# Altium PCB alireza_aghasadeghi.PcbDoc
Units mm, origin at the board's own origin, x right, y up, seen from the top; angles counter-clockwise.
Board outline 101.05 x 73 mm, 2 copper layers (Top Layer, Bottom Layer); 28 components, 23 nets, 119 pads, 18 vias.
Unrouted connection lines stored in the file: 1.
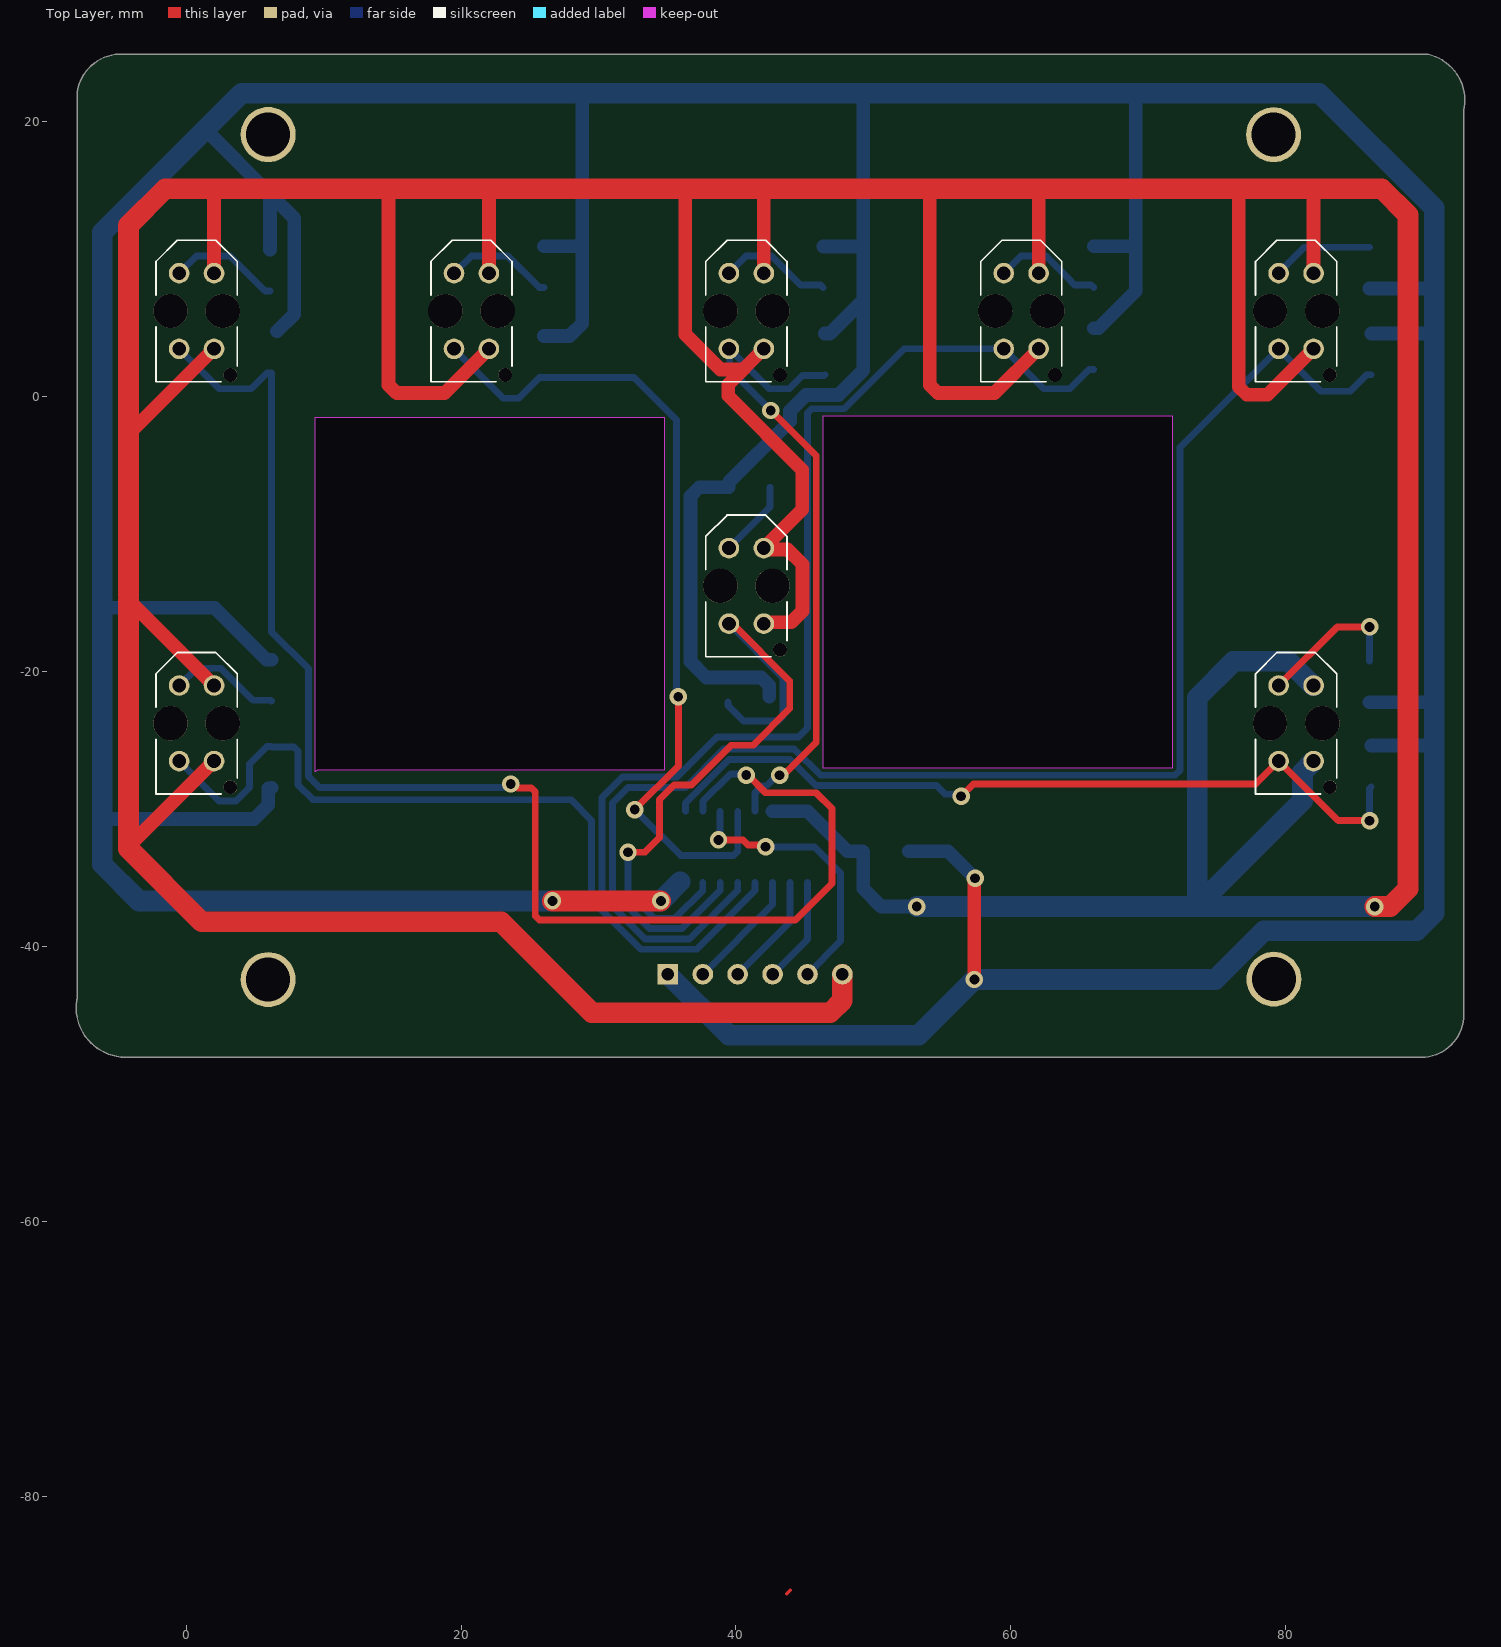
[diagram p0: Top Layer view]
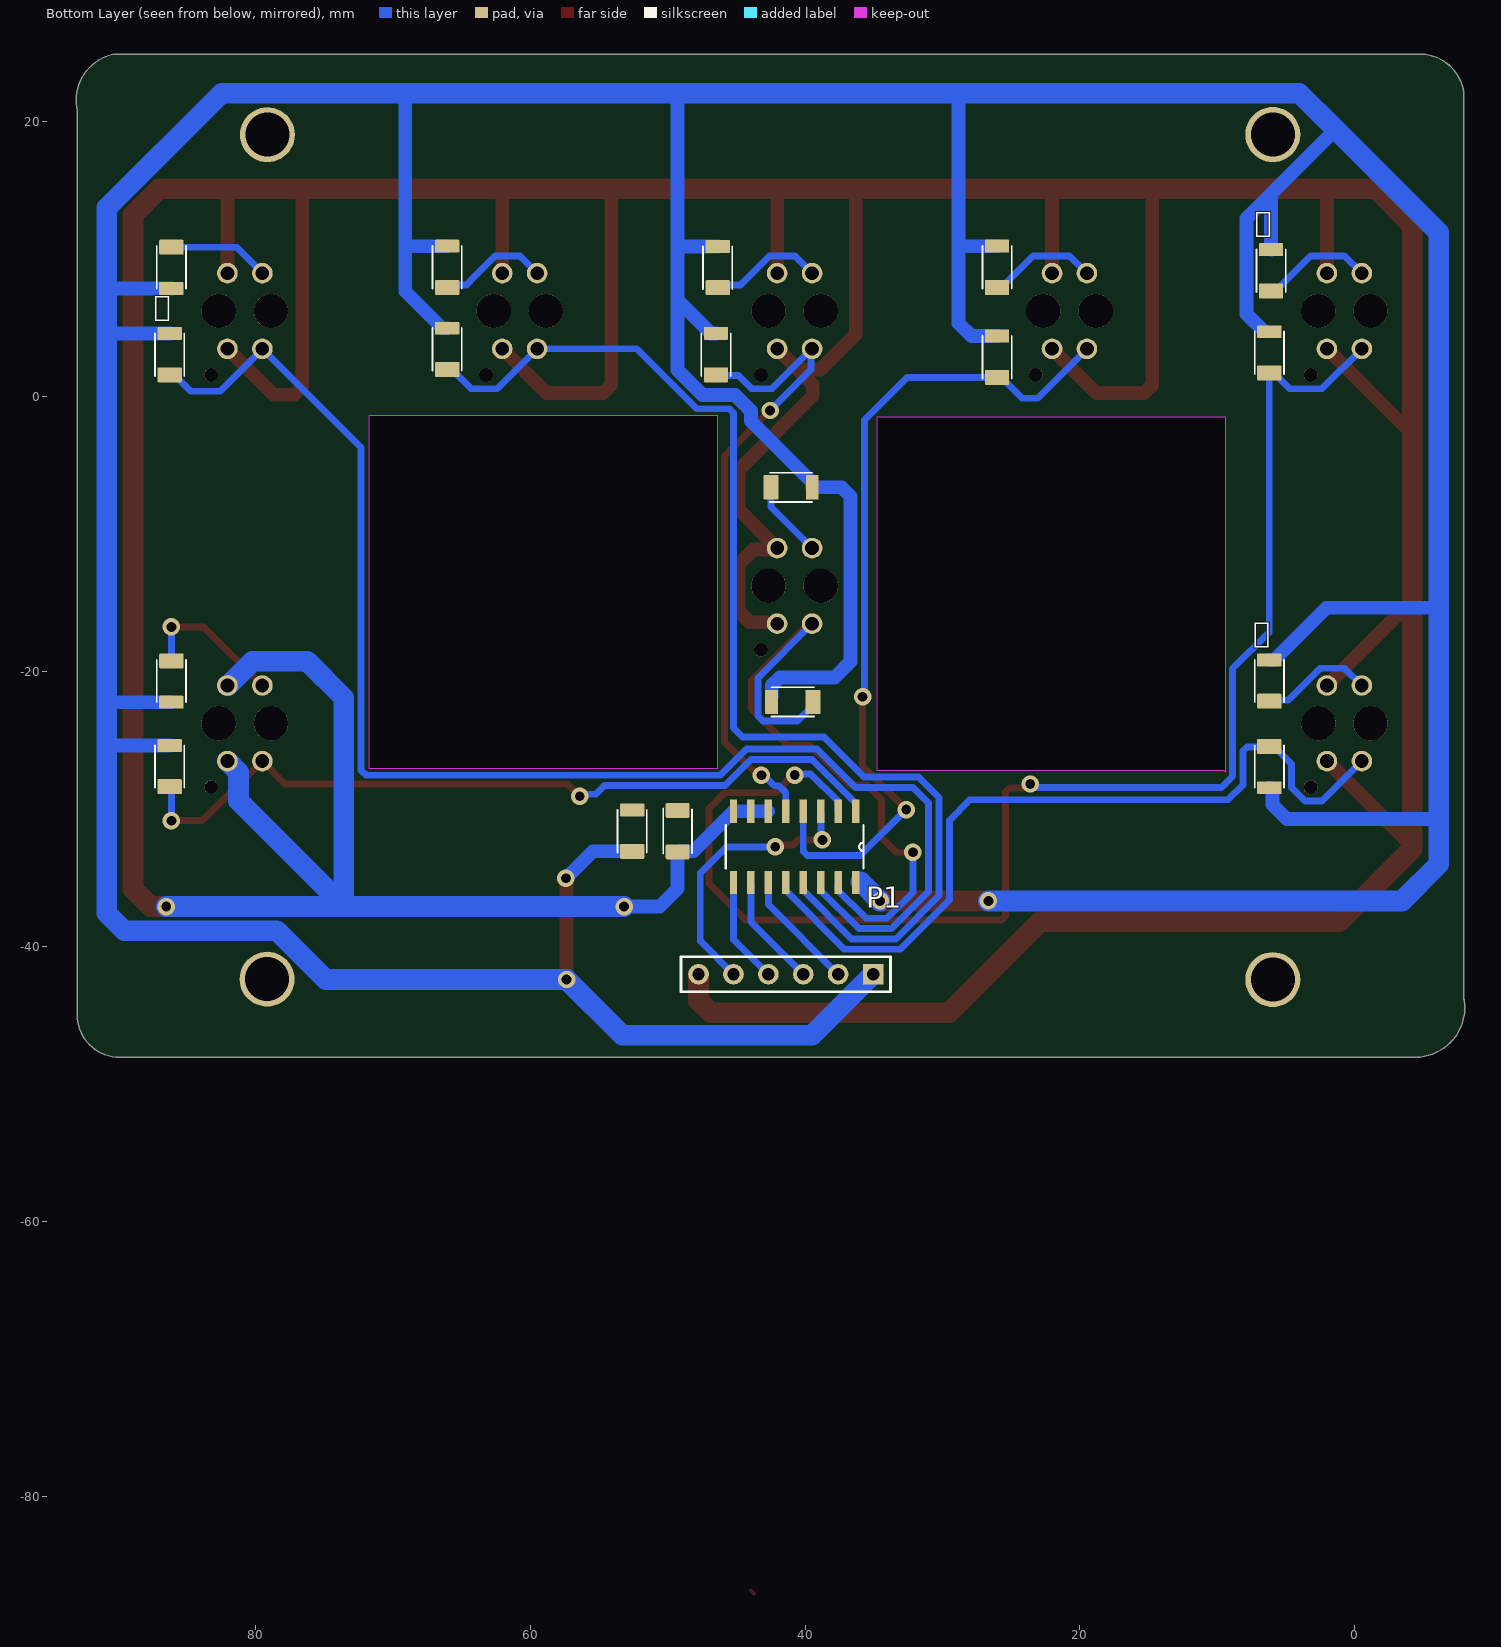
[diagram p1: Bottom Layer view, seen from below]
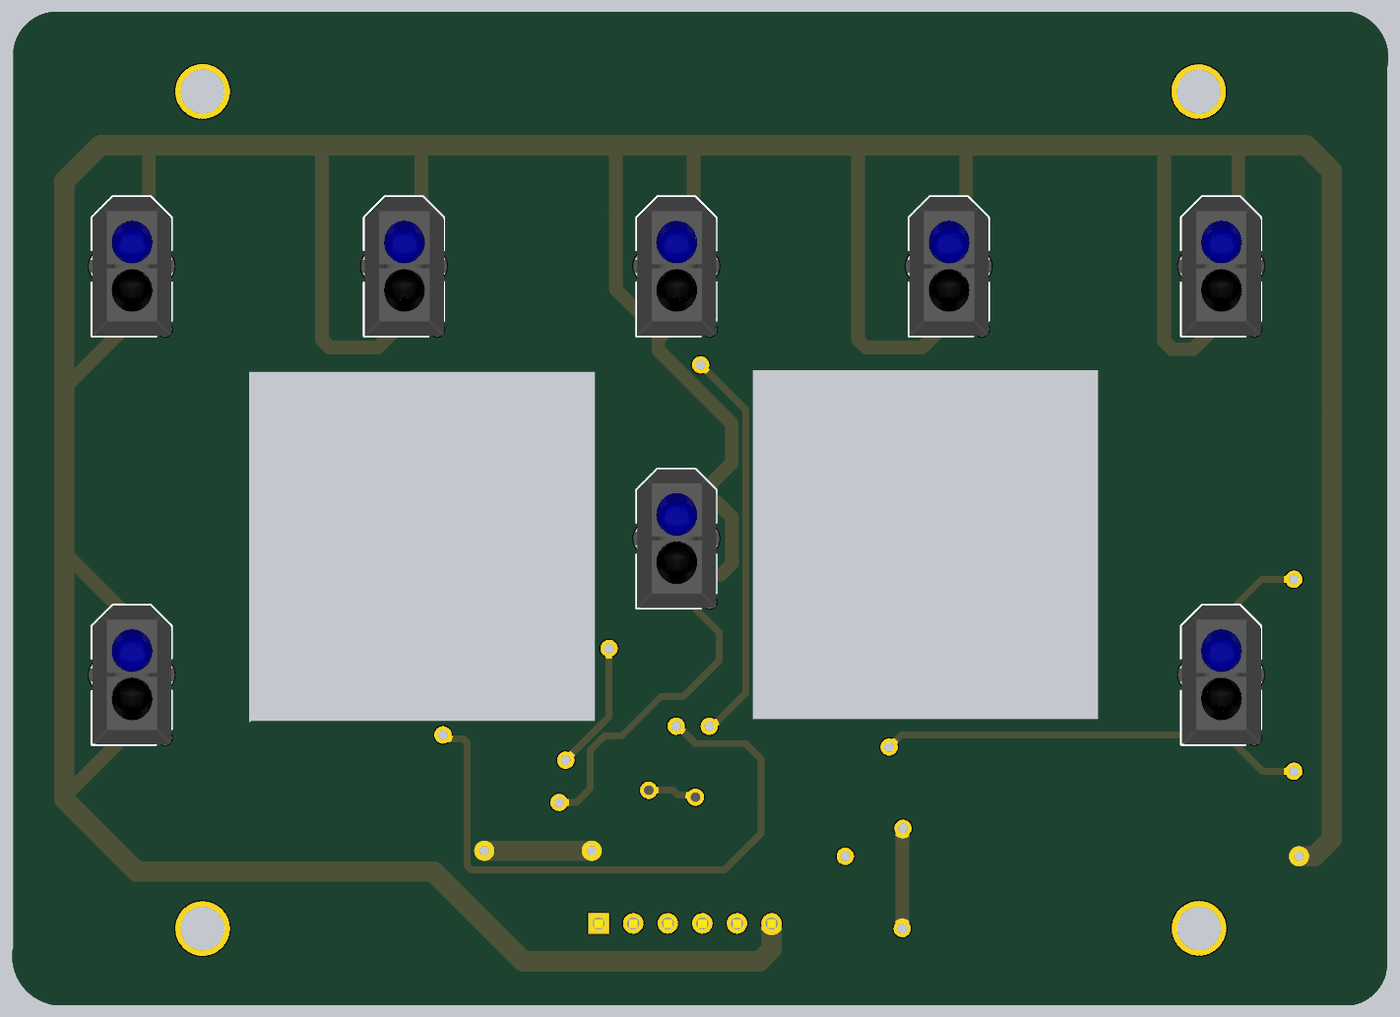
[diagram p2: 3D render of the assembled board from above, using the file's embedded part models]
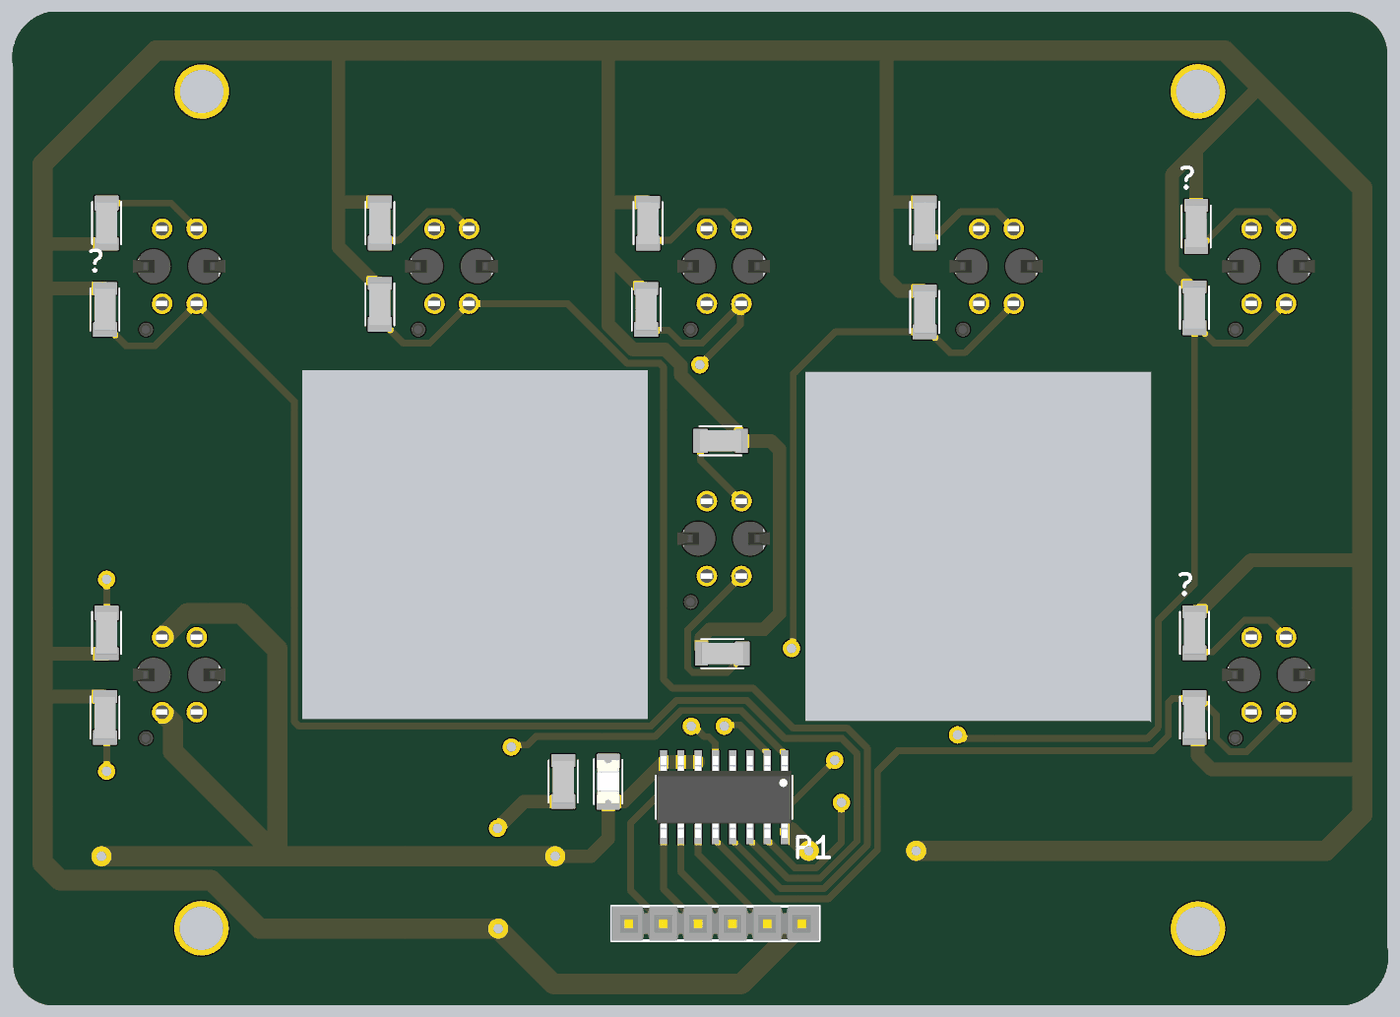
[diagram p3: 3D render of the assembled board from below, using the file's embedded part models]

## Layer stack, top to bottom
Top Solder: solder mask 0.0102, Solder Resist, Dk 3.5
Top Layer: signal copper 0.0356
Dielectric 1: dielectric 0.32, FR-4, Dk 4.8
Bottom Layer: signal copper 0.0356
Bottom Solder: solder mask 0.0102, Solder Resist, Dk 3.5

## Board outline
-4.757,-48.057 cw(c-4.37,-44.438) -7.974,-43.927 cw(c-7.848,-43.945) -7.923,-43.842 -7.923,7.541 -7.923,22.108 cw(c-7.795,22.108) -7.922,22.125 cw(c-4.727,21.696) -4.307,24.891 90.342,24.891 cw(c90.342,24.764) 90.369,24.888 cw(c89.632,21.559) 93.042,21.559 cw(c89.633,21.559) 92.964,20.836 92.964,6.805 92.964,-44.957 cw(c89.85,-44.973) 92.964,-44.973 cw(c89.849,-44.973) 89.865,-48.088 cw(c89.865,-47.565) 89.865,-48.088 -4.628,-48.088 cw(c-4.628,-47.961) -4.715,-48.054 cw(c-4.744,-47.93)
cut-out: 46.355,-1.397 71.755,-1.397 71.755,-27.051 46.355,-27.051
cut-out: 9.398,-1.524 34.798,-1.524 34.798,-27.178 9.525,-27.178 9.398,-27.305

## Design rules (kind name [scope] priority, off if disabled: settings)
Clearance [All] p1: gap=0.254 ignorepadtopadclearanceinfootprint=FALSE except(0: Arc-Hole Track-Hole SMDPad-Hole THPad-Hole Via-Hole Fill-Hole Poly-Hole Region-Hole Text-Hole)
PolygonConnect [All] p1: connectstyle=Relief reliefconductorwidth=0.254 reliefentries=4 polygonreliefangle="90 Angle" airgapwidth=0.254
RoutingVias [All] p1: holewidth=0.711 width=1.27 viastyle="Through Hole" minholewidth=0.711 minwidth=1.27 maxholewidth=0.711 maxwidth=1.27
SolderMaskExpansion [All] p1: expansion=0.102 istentingtop=FALSE
Width [All] p1: maxlimit=2 minlimit=0.5 preferedwidth=1 minimp=50.000000 maximp=50.000000 favimp=50.000000
30 further rules are at their usual default settings.

## Classes and differential pairs
component class "sensor sheet": P1

## Components (designator, comment, footprint, x,y, rotation, side; value= is the part's Value field where it differs from the comment)
 "4-1879462-2" RESC3115X65N 86.233,3.048 r90 bottom (schematic designator R4)
 "4-1879462-2" RESC3115X65N 6.223,-20.701 r90 bottom (schematic designator R7)
 "4-1879462-2" RESC3115X65N 6.096,9.144 r90 bottom (schematic designator R13)
D "LTST-C230KFKT" LEDC3216X110 49.276,-31.623 r270 bottom
P1 "Header 6" HDR1X6 35.052,-42.037 r0 bottom
R1 "4-1879462-2" RESC3115X65N 66.04,9.398 r90 bottom
R2 "4-1879462-2" RESC3115X65N 66.04,3.429 r90 bottom
R3 "4-1879462-2" RESC3115X65N 86.106,9.398 r270 bottom
R5 "4-1879462-2" RESC3115X65N 41.021,-6.604 r180 bottom
R6 "4-1879462-2" RESC3115X65N 40.894,-22.225 r0 bottom
R8 "4-1879462-2" RESC3115X65N 6.223,-26.924 r270 bottom
R9 "4-1879462-2" RESC3115X65N 86.106,-20.701 r270 bottom
R10 "4-1879462-2" RESC3115X65N 86.233,-26.924 r90 bottom
R11 "4-1879462-2" RESC3115X65N 46.355,9.382 r90 bottom
R12 "4-1879462-2" RESC3115X65N 46.482,3.048 r90 bottom
R14 "4-1879462-2" RESC3115X65N 6.223,3.175 r90 bottom
R15 "4-1879462-2" RESC3115X65N 26.035,9.398 r90 bottom
R16 "4-1879462-2" RESC3115X65N 26.035,2.862 r90 bottom
R17 "4-1879462-2" RESC3115X65N 52.578,-31.623 r90 bottom
U1 "TCRT5000" OPTO_TCRT5000 60.762,6.223 r90 top
U2 "TCRT5000" OPTO_TCRT5000 80.762,6.223 r90 top
U3 "TCRT5000" OPTO_TCRT5000 40.762,-13.777 r90 top
U4 "TCRT5000" OPTO_TCRT5000 0.762,-23.777 r90 top
U5 "TCRT5000" OPTO_TCRT5000 80.762,-23.777 r90 top
U6 "TCRT5000" OPTO_TCRT5000 40.762,6.223 r90 top
U7 "TCRT5000" OPTO_TCRT5000 0.762,6.223 r90 top
U8 "TCRT5000" OPTO_TCRT5000 20.762,6.223 r90 top
U9 "74HC4051D" SOIC127P600X175-16N 40.767,-32.766 r270 bottom

## Footprints (in the part's own frame and the unit in brackets; to place one, negate y for a bottom-side part, rotate by r counter-clockwise, add the part's x,y. Pads: shape width x height; smd on the part's side, far side on the other; paste and mask are expansions set on the pad)
HDR1X6 [mm] "Connector; Header; 6 Position"
  rect 1.5x1.5 hole 0.9: 1(0,0)
  round 1.5 hole 0.9: 2(2.54,0) 3(5.08,0) 4(7.62,0) 5(10.16,0) 6(12.7,0)
  silkscreen extent -1.27,-1.27 13.97,1.27, body extent -1.26,-1.25 13.98,1.29, height 8.38
LEDC3216X110 [mm]
  rrect20% 1.1x1.73 smd: A(1.51,0) C(-1.51,0)
  silkscreen extent -1.65,-1.04 1.65,1.04, body extent -1.6,-0.8 1.6,0.8, height 1.1
OPTO_TCRT5000 [mm]
  round 1.5 hole 1: A(2.75,1.27) CATH(2.75,-1.27) COLL(-2.75,1.27) E(-2.75,-1.27)
  round 1 hole 1 unplated: ""(-4.65,-2.45)
  round 2.5 hole 2.5 unplated: ""(0,1.9) ""(0,-1.9)
  silkscreen extent -5.15,-2.95 5.15,2.95, body extent -5.1,-3.43 5.1,3.37, height 7.2
RESC3115X65N [mm]
  rrect14% 1.09x1.77 smd: 1(-1.465,0)
  rrect14% 0.94x1.77 smd: 2(1.54,0)
  silkscreen extent -1.55,-1.06 1.55,1.06, body extent -1.55,-0.77 1.55,0.77, height 0.53
SOIC127P600X175-16N [mil]
  rect 67x21 smd: 1(-102,175) 2(-102,125) 3(-102,75) 4(-102,25) 5(-102,-25) 6(-102,-75) 7(-102,-125) 8(-102,-175) 9(102,-175) 10(102,-125) 11(102,-75) 12(102,-25) 13(102,25) 14(102,75) 15(102,125) 16(102,175)
  silkscreen extent -62,-197 62,197, body extent -118,-195 118,195, height 69

## Part data
   R1 R2 R3 R5 R6 R8 R9 R10 R11 R12 R14 R15 R16 R17: "RES 0.82 OHM 1% 1/4W 1206", Package=1206, Power_Rating=".25 W", Resistance=82, Tolerance=1%, Availability="In Stock", Check_prices=https://www.snapeda.com/parts/4-1879462-2/TE+Connectivity/view-part/?ref=eda, EU_RoHS_Compliance="Compliant with Exemptions", MF="TE Connectivity", MP=4-1879462-2, Price=None, SnapEDA_Link=https://www.snapeda.com/parts/4-1879462-2/TE+Connectivity/view-part/?ref=snap
D: "Orange 605nm LED Indication - Discrete 2V 1206 (3216 Metric)", Package="1206 Lite-On", Availability=Unavailable, MF="Lite-On Inc.", MP=LTST-C230KFKT, Price=None, SnapEDA_Link=https://www.snapeda.com/parts/LTST-C230KFKT/Lite-On%20Inc./view-part/353318/?ref=snap
P1: "Header, 6-Pin", LatestRevisionDate=17-Jul-2002, LatestRevisionNote="Re-released for DXP Platform.", Publisher="Altium Limited"
U1 U2 U3 U4 U5 U6 U7 U8: "950 nm 60 mA Through Hole Reflective Optical Sensor with Transistor Output", Package=None, Availability=Unavailable, MP=TCRT5000, Price=None
U9: "1 Circuit IC Switch 8:1 130Ohm 16-SOIC", Package="SOIC-16 Toshiba", Availability="In Stock", Check_prices=https://www.snapeda.com/parts/74HC4051D/Toshiba/view-part/?ref=eda, MF=Toshiba, MP=74HC4051D, Price=None, Purchase-URL=https://pricing.snapeda.com/search/part/74HC4051D/?ref=eda, SnapEDA_Link=https://www.snapeda.com/parts/74HC4051D/Toshiba/view-part/?ref=snap

## Free pads (board coordinates)
  round 4 hole 3.2: ""(5.969,-42.418) ""(5.969,19.05) ""(5.971,19.067) ""(79.121,19.05) ""(79.144,-42.394)

## Via types
v1: diameter 1.27, hole 0.711, Top Layer to Bottom Layer, 18 vias

## Nets (pads, with @x,y where several pads share a name; then routed paths per layer and width w, separated by ;. In a path a pad name is that pad's centre, name@x,y a point inside that pad or via, vN(x,y) a via of type N, cw(c..) or ccw(c..) an arc to the next point about the centre after c; other vN are vias at no path point)
5: .2 P1.1 R1.2 R2.2 R3.2 R5.2 R6.2 R8.2 R9.2 R10.2 R11.2 R12.2 R14.2 R15.2 R16.2 R17.1 U9.16 | length 495.4
  Top Layer w1: v1(57.352,-42.418) 57.352,-35.104 v1(57.404,-35.052)
  Top Layer w1.5: v1(26.659,-36.703) v1(34.544,-36.703)
  Bottom Layer w1: -6.096,-30.734 4.953,-30.734 5.983,-29.704 5.983,-28.494 6.193,-28.494 R8.2 ; -6.096,-15.367 2.074,-15.367 5.868,-19.161 .2@6.223,-19.161 ; 1.397,19.431 6.159,14.668 7.874,12.954 7.874,6.011 R14.2@6.608,4.745 ; .2@6.096,10.684 6.096,14.605 ; R16.2 27.897,4.402 28.829,5.334 28.829,10.922 ; R15.2 28.813,10.938 28.829,10.922 ; 28.702,22.071 28.829,21.944 28.829,10.922 ; R5.2 37.338,-6.604 36.691,-7.251 36.691,-19.292 37.846,-20.447 41.845,-20.447 42.43,-21.033 R6.2@42.43,-21.84 ; R5.2@39.511,-6.219 43.934,-1.796 43.934,-1.044 45.089,0.111 47.462,0.111 49.276,1.925 49.276,7.027 ; R11.2 49.276,10.922 ; R12.2 46.837,4.588 49.276,7.027 ; 49.276,22.071 49.276,10.922 ; R17.1 55.44,-33.088 v1(57.404,-35.052) ; R2.2 66.395,4.969 69.088,7.662 69.088,11.049 ; R1.2 68.977,10.938 69.088,11.049 ; 69.088,22.071 69.088,11.049 ; R9.2 90.789,-22.241 90.805,-22.225 ; R3.2 90.662,7.858 90.805,8.001 ; R10.2 90.789,-25.384 90.805,-25.4 ; .2@86.233,4.588 90.789,4.588 90.805,4.572 ; 49.276,7.027 49.276,10.922
  Bottom Layer w1.5: v1(26.659,-36.703) -3.429,-36.703 -6.096,-34.036 -6.096,-30.734 -6.096,-15.367 -6.096,11.938 1.397,19.431 4.037,22.071 28.702,22.071 49.276,22.071 69.088,22.071 82.45,22.071 90.805,13.716 90.805,8.001 90.805,4.572 90.805,-22.225 90.805,-25.4 90.805,-37.592 89.535,-38.862 78.428,-38.862 74.872,-42.418 v1(57.352,-42.418) 53.288,-46.482 39.497,-46.482 P1.1 ; v1(34.544,-36.703) 35.941,-35.306
GND: D.A P1.6 U1.CATH U1.E U2.CATH U2.E U3.CATH U3.E U4.CATH U4.E U5.CATH U5.E U6.CATH U6.E U7.CATH U7.E U8.CATH U8.E U9.6 U9.7 U9.8 | length 509.3
  Top Layer w1: -4.191,-32.893 -4.191,-32.75 U4.E ; -4.191,-14.478 -4.191,-14.804 U4.CATH ; -4.191,-2.413 -3.854,-2.413 U7.E ; 1.905,15.113 2.032,14.986 U7.CATH ; 14.732,15.113 14.732,0.84 15.318,0.254 18.813,0.254 U8.E ; 21.971,15.113 22.032,15.052 U8.CATH ; 36.322,15.113 36.322,4.516 38.869,1.969 40.393,1.969 ; U3.E 42.128,-16.431 44.021,-16.431 44.847,-15.605 44.847,-12.208 43.762,-11.123 42.128,-11.123 U3.CATH 44.831,-8.228 44.831,-5.334 39.442,0.055 39.442,0.883 U6.E ; U6.CATH 42.032,15.108 42.037,15.113 ; 54.102,15.113 54.102,0.84 54.688,0.254 58.813,0.254 U1.E ; 61.976,15.113 62.032,15.057 U1.CATH ; 76.581,15.113 76.581,0.713 77.167,0.127 78.686,0.127 U2.E ; U2.CATH 82.032,15.103 82.042,15.113
  Top Layer w1.5: -4.191,-32.893 1.143,-38.227 22.924,-38.227 29.528,-44.831 46.873,-44.831 47.752,-43.952 P1.6 ; -4.191,-32.75 -4.191,-14.804 ; -4.191,-14.478 -4.191,-2.413 -4.191,12.446 -1.524,15.113 1.905,15.113 14.732,15.113 21.971,15.113 36.322,15.113 42.037,15.113 54.102,15.113 61.976,15.113 76.581,15.113 82.042,15.113 86.995,15.113 88.9,13.208 88.9,-35.814 87.61,-37.104 86.491,-37.104 v1(86.487,-37.108)
  Bottom Layer w1: U9.6 U9.7 U9.8 48.12,-33.083 49.226,-33.083 D.A 49.276,-35.814 50.57,-37.108 v1(53.166,-37.108)
  Bottom Layer w1.5: v1(53.166,-37.108) v1(86.487,-37.108) ; 73.529,-37.108 81.226,-29.412 81.226,-27.333 U5.E ; 73.573,-37.065 73.573,-21.909 76.209,-19.273 80.219,-19.273 81.973,-21.027 U5.CATH
NetD_C: D.C R17.2
NetR1_1: R1.1 U1.A | length 8
  Bottom Layer w0.5: U1.A 60.746,10.227 62.551,10.227 64.389,8.389 64.389,8.382 64.643,8.128 65.845,8.128 R1.1
NetR3_1: R3.1 U2.A | length 7.4
  Bottom Layer w0.5: U2.A 81.382,10.863 R3.1
NetR5_1: R5.1 U3.A | length 5.7
  Bottom Layer w0.5: U3.A 42.486,-8.033 R5.1
NetR7_1: .1@6.223,-22.166 U4.A | length 8.2
  Bottom Layer w0.5: U4.A 0.746,-19.773 2.551,-19.773 4.881,-22.102 6.159,-22.102 .1@6.223,-22.166
NetR9_1: R9.1 U5.A | length 10.9
  Top Layer w0.5: U5.A 83.755,-16.764 v1(86.106,-16.764)
  Bottom Layer w0.5: R9.1 v1(86.106,-16.764)
NetR11_1: R11.1 U6.A | length 8.3
  Bottom Layer w0.5: U6.A 40.746,10.227 42.605,10.227 44.704,8.128 46.144,8.128 R11.1
NetR13_1: .1@6.096,7.679 U7.A | length 8.2
  Bottom Layer w0.5: U7.A 0.746,10.227 3.208,10.227 5.756,7.679 .1@6.096,7.679
NetR15_1: R15.1 U8.A | length 8
  Bottom Layer w0.5: U8.A 20.746,10.227 23.401,10.227 25.695,7.933 R15.1
out: P1.5 U9.3 | length 20.4
  Top Layer w0.5: v1(38.735,-32.258) 40.529,-32.258 40.89,-32.619 42.017,-32.619 v1(42.164,-32.766)
  Bottom Layer w0.5: v1(38.735,-32.258) 38.845,-32.148 38.845,-30.192 U9.3 ; v1(42.164,-32.766) 45.72,-32.766 47.625,-34.671 47.625,-39.624 P1.5
s0: P1.2 U9.11 | length 8.8
  Bottom Layer w0.5: P1.2 42.671,-36.958 U9.11
s1: P1.3 U9.10 | length 8.3
  Bottom Layer w0.5: P1.3 43.942,-38.227 U9.10
s2: P1.4 U9.9 | length 7.7
  Bottom Layer w0.5: P1.4 45.212,-39.497 U9.9
Y0: R2.1 U1.COLL U9.13 | length 84.9
  Bottom Layer w0.5: U9.13 40.132,-35.941 36.608,-39.465 33.4,-39.465 30.257,-36.322 30.257,-29.179 31.754,-27.682 35.706,-27.682 38.623,-24.765 44.55,-24.765 45.212,-24.103 45.212,-1.186 45.505,-0.893 47.877,-0.893 52.243,3.473 U1.COLL 62.396,0.569 64.305,0.569 65.7,1.964 R2.1
Y1: .1@86.233,1.583 U2.COLL U9.14 | length 103.2
  Bottom Layer w0.5: U9.14 38.862,-35.941 36.092,-38.711 33.712,-38.711 31.011,-36.01 31.011,-29.568 32.143,-28.436 36.334,-28.436 39.116,-25.654 44.245,-25.654 46.146,-27.555 54.91,-27.555 71.964,-27.555 72.319,-27.2 72.319,-3.7 U2.COLL 82.584,0.381 84.691,0.381 85.893,1.583 .1@86.233,1.583
Y2: R6.1 U3.COLL U9.15 | length 49.7
  Top Layer w0.5: v1(32.15,-33.154) 33.394,-33.154 34.445,-32.103 34.445,-29.31 35.497,-28.258 36.766,-28.258 39.649,-25.375 41.25,-25.375 43.917,-22.707 43.917,-20.692 39.752,-16.527 U3.COLL
  Bottom Layer w0.5: v1(32.15,-33.154) 32.15,-36.083 34.025,-37.957 35.576,-37.957 37.592,-35.941 U9.15 ; R6.1 39.429,-22.489 40.554,-23.614 43.074,-23.614 43.434,-23.254 43.434,-20.469 U3.COLL
Y3: R8.1 U4.COLL U9.12 | length 59.1
  Bottom Layer w0.5: U4.COLL 2.396,-29.431 3.628,-29.431 4.608,-28.451 4.608,-26.734 5.883,-25.459 R8.1 6.275,-25.511 7.847,-25.511 8.14,-25.804 8.14,-28.252 9.225,-29.337 28.009,-29.337 29.503,-30.832 29.503,-36.635 33.088,-40.219 37.124,-40.219 41.402,-35.941 U9.12
Y4: R10.1 U5.COLL U9.1 | length 58.4
  Top Layer w0.5: v1(56.388,-29.083) 57.277,-28.194 77.825,-28.194 U5.COLL 83.826,-30.861 v1(86.106,-30.861) v1@86.36,-30.861
  Bottom Layer w0.5: U9.1 36.322,-29.591 39.505,-26.408 43.933,-26.408 45.834,-28.309 54.598,-28.309 55.225,-28.936 56.241,-28.936 v1(56.388,-29.083) ; v1(86.106,-30.861) 86.106,-28.516 R10.1
Y5: R12.1 U6.COLL U9.5 | length 46.7
  Top Layer w0.5: v1(42.545,-1.016) 45.851,-4.322 45.851,-25.142 v1@43.561,-27.432
  Bottom Layer w0.5: U6.COLL U6.COLL@39.556,3.409 ; U9.5 41.402,-28.829 41.91,-28.321 42.21,-28.321 42.972,-27.559 v1(43.18,-27.559) ; v1(42.545,-1.016) 39.556,1.973 U6.COLL@39.556,3.409 ; R12.1 46.418,1.519 44.847,1.519 43.897,0.569 42.396,0.569 U6.COLL@39.556,3.409
Y6: R14.1 U7.COLL U9.2 | length 105.1
  Top Layer w0.5: v1(23.622,-28.194) 23.83,-28.194 24.121,-28.484 25.112,-28.484 25.405,-28.777 25.405,-37.807 25.697,-38.1 44.323,-38.1 46.99,-35.433 46.99,-29.972 45.847,-28.829 42.164,-28.829 40.882,-27.547 v1(40.747,-27.547)
  Bottom Layer w0.5: U7.COLL 2.396,0.569 4.742,0.569 5.883,1.71 R14.1 6.223,-17.132 8.894,-19.803 8.894,-27.647 9.695,-28.448 v1@23.495,-28.448 ; U9.2 37.609,-30.158 37.609,-29.447 39.604,-27.452 40.652,-27.452 v1(40.747,-27.547)
Y7: R16.1 U8.COLL U9.4 | length 61.1
  Top Layer w0.5: v1(32.639,-30.05) 35.814,-26.875 v1(35.814,-21.844)
  Bottom Layer w0.5: U8.COLL 23.092,-0.127 24.171,-0.127 25.695,1.397 R16.1 32.59,1.397 35.687,-1.7 v1@35.687,-21.717 ; v1(32.639,-30.05) 35.99,-33.401 39.839,-33.401 40.132,-33.108 U9.4
pads on no net: U1. U2. U3. U4. U5. U6. U7. U8.
copper on no net: | length 0.4
  Top Layer w0.254: 43.693,-87.122 43.947,-86.868

## Silkscreen, mask and mechanical layers (free items; w line width, h text height)
Mechanical 1:
  circle w0.254: c79.12,-42.418 r1.65
  circle w0.254: c6,-42.418 r1.65
  circle w0.254: c6,19.05 r1.65
  circle w0.254: c79.121,19.05 r1.65
  lines w0.254: -7.848,-43.945 ccw(c-4.37,-44.438) -4.744,-47.93 ; -7.795,-43.942 -7.795,7.541 -7.795,22.108 cw(c-4.727,21.696) -4.315,24.764 19.349,24.764 66.678,24.764 90.342,24.764 cw(c89.632,21.559) 92.837,20.85 92.837,15.875 92.837,6.805 92.837,-44.958 cw(c89.849,-44.973) 89.865,-47.961 -4.628,-47.961 ; 9.461,-27.241 34.861,-27.241 34.861,-1.587 9.461,-1.587 9.461,-27.241 ; 46.355,-27.051 71.755,-27.051 71.755,-1.397 46.355,-1.397 46.355,-27.051